# Altium PCB TCRT5000.PcbDoc
Units mm, origin at the board's own origin, x right, y up, seen from the top; angles counter-clockwise.
Board outline 98 x 98 mm, 2 copper layers (Top Layer, Bottom Layer); 66 components, 50 nets, 204 pads, 36 vias.
Unrouted connection lines stored in the file: 154.
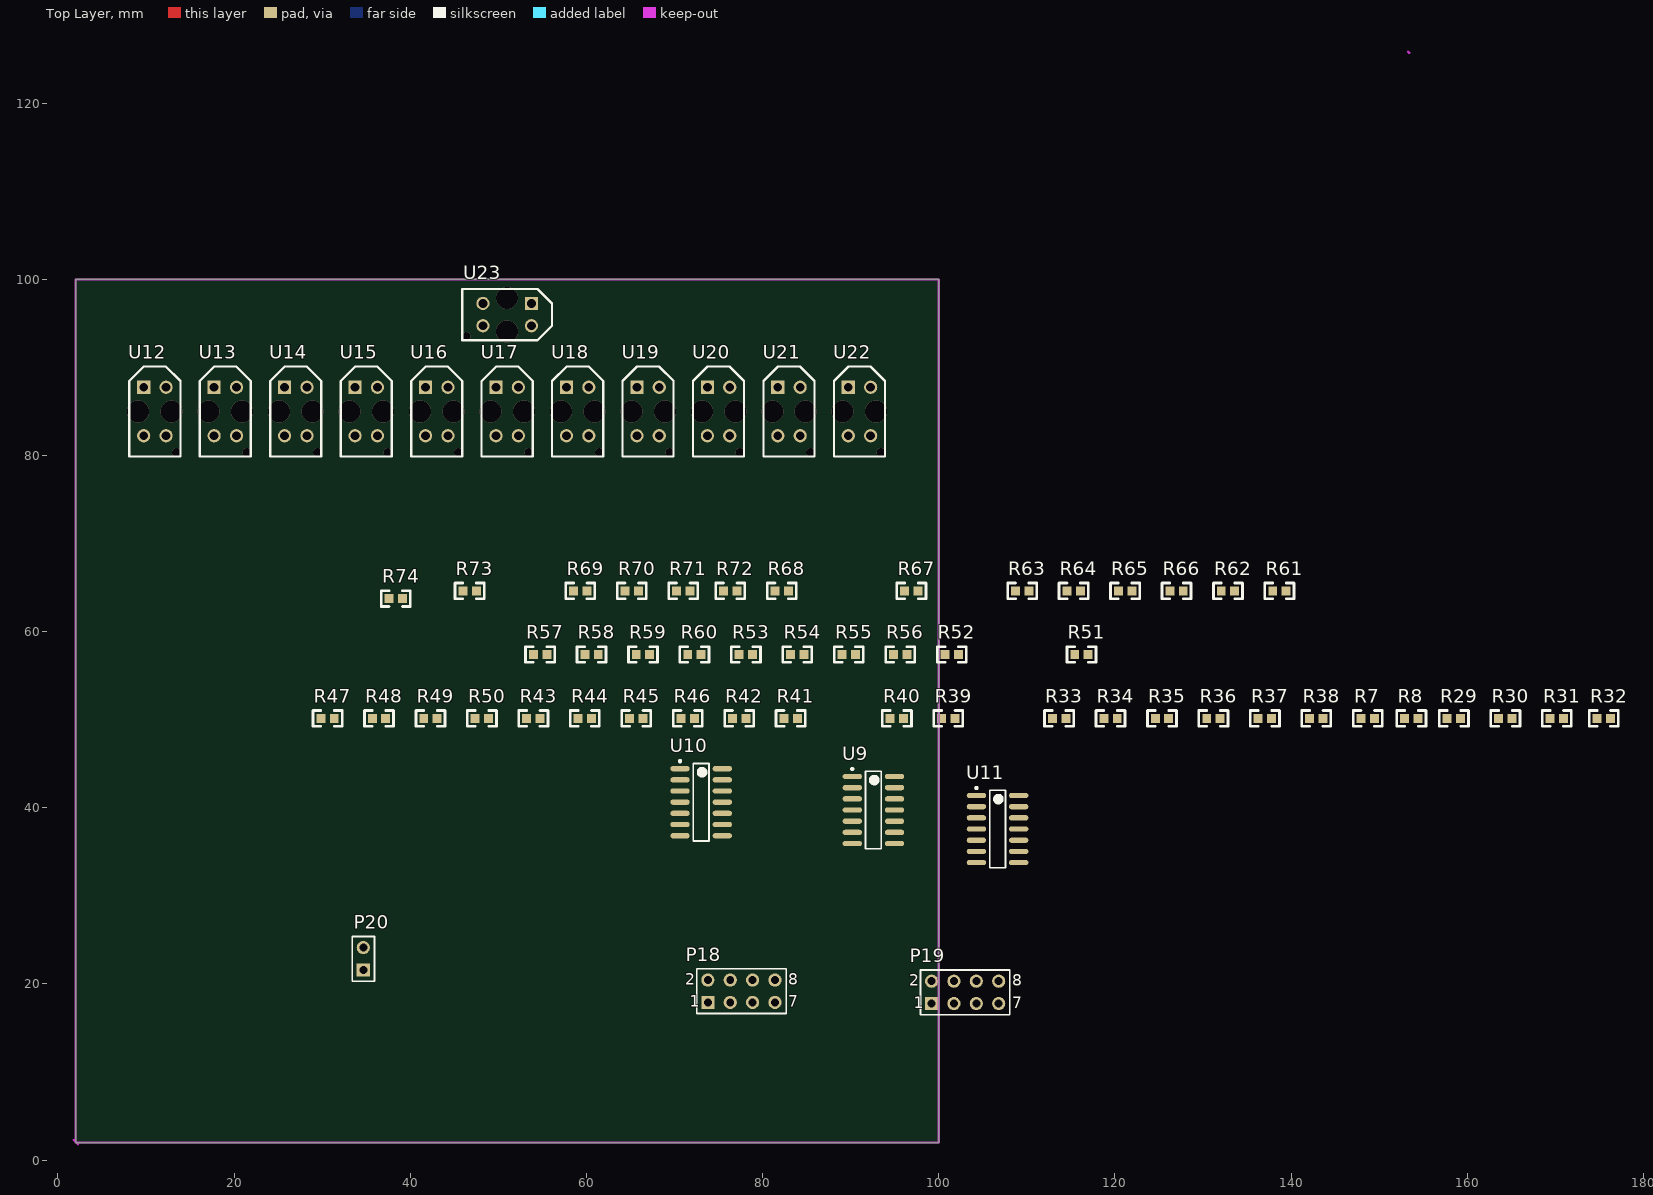
[diagram p0: Top Layer view]
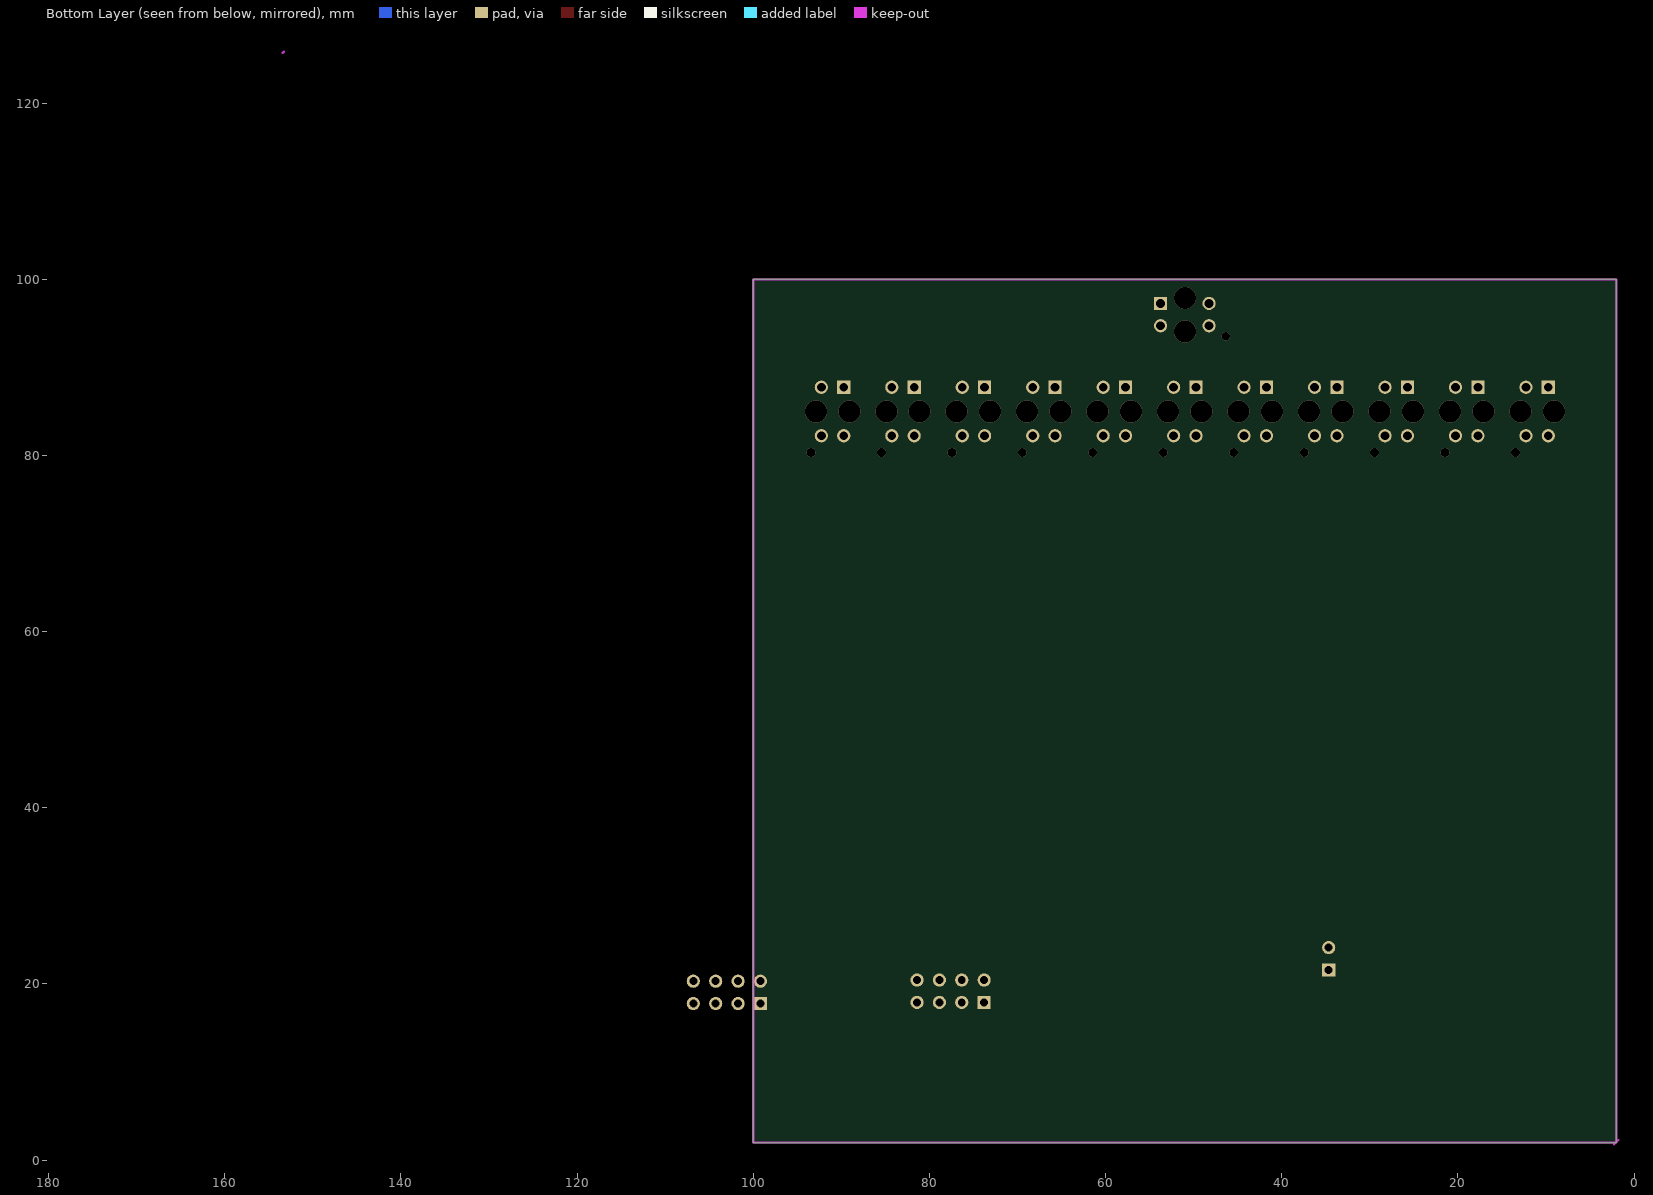
[diagram p1: Bottom Layer view, seen from below]

## Layer stack, top to bottom
Top Solder: solder mask 0.0102, Solder Resist, Dk 3.5
Top Layer: signal copper 0.0356
Dielectric 1: dielectric 0.32, FR-4, Dk 4.8
Bottom Layer: signal copper 0.0356
Bottom Solder: solder mask 0.0102, Solder Resist, Dk 3.5

## Board outline
2,2 2,100 100,100 100,2

## Design rules (kind name [scope] priority, off if disabled: settings)
Clearance [All] p1: gap=0.254
PolygonConnect [All] p1: connectstyle=Relief reliefconductorwidth=0.254 reliefentries=4 polygonreliefangle="90 Angle" airgapwidth=0.254
RoutingVias [All] p1: holewidth=0.711 width=1.27 viastyle="Through Hole" minholewidth=0.711 minwidth=1.27 maxholewidth=0.711 maxwidth=1.27
SolderMaskExpansion [All] p1: expansion=0.102
Width [All] p1: maxlimit=0.254 minlimit=0.254 preferedwidth=0.254
29 further rules are at their usual default settings.

## Classes and differential pairs
component class "Components Class 1": P18 P20 R40 R41 R42 R43 R44 R45 R46 R47 R48 R49 R50 R53 R54 R55 R56 R57 R58 R59 R60 R67 R68 R69 R70 R71 R72 R73 R74 U9 U10

## Components (designator, comment, footprint, x,y, rotation, side; value= is the part's Value field where it differs from the comment)
P18 "Header 4X2" HDR2X4 73.787,17.907 r0 top
P19 "Header 4X2" HDR2X4 99.187,17.78 r0 top
P20 "Header 2" HDR1X2 34.671,21.59 r90 top
R7 "Res3" 0603 147.955,50.165 r0 top
R8 "Res3" 0603 152.908,50.165 r0 top
R29 "Res3" 0603 157.734,50.165 r0 top
R30 "Res3" 0603 163.576,50.165 r0 top
R31 "Res3" 0603 169.418,50.165 r0 top
R32 "Res3" 0603 174.752,50.165 r0 top
R33 "Res3" 0603 112.903,50.165 r0 top
R34 "Res3" 0603 118.745,50.165 r0 top
R35 "Res3" 0603 124.587,50.165 r0 top
R36 "Res3" 0603 130.429,50.165 r0 top
R37 "Res3" 0603 136.271,50.165 r0 top
R38 "Res3" 0603 142.113,50.165 r0 top
R39 "Res3" 0603 100.33,50.165 r0 top
R40 "Res3" 0603 94.488,50.165 r0 top
R41 "Res3" 0603 82.423,50.165 r0 top
R42 "Res3" 0603 76.581,50.165 r0 top
R43 "Res3" 0603 53.213,50.165 r0 top
R44 "Res3" 0603 59.055,50.165 r0 top
R45 "Res3" 0603 64.897,50.165 r0 top
R46 "Res3" 0603 70.739,50.165 r0 top
R47 "Res3" 0603 29.845,50.165 r0 top
R48 "Res3" 0603 35.687,50.165 r0 top
R49 "Res3" 0603 41.529,50.165 r0 top
R50 "Res3" 0603 47.371,50.165 r0 top
R51 "Res3" 0603 115.443,57.404 r0 top
R52 "Res3" 0603 100.711,57.404 r0 top
R53 "Res3" 0603 77.343,57.404 r0 top
R54 "Res3" 0603 83.185,57.404 r0 top
R55 "Res3" 0603 89.027,57.404 r0 top
R56 "Res3" 0603 94.869,57.404 r0 top
R57 "Res3" 0603 53.975,57.404 r0 top
R58 "Res3" 0603 59.817,57.404 r0 top
R59 "Res3" 0603 65.659,57.404 r0 top
R60 "Res3" 0603 71.501,57.404 r0 top
R61 "Res3" 0603 137.922,64.643 r0 top
R62 "Res3" 0603 132.08,64.643 r0 top
R63 "Res3" 0603 108.712,64.643 r0 top
R64 "Res3" 0603 114.554,64.643 r0 top
R65 "Res3" 0603 120.396,64.643 r0 top
R66 "Res3" 0603 126.238,64.643 r0 top
R67 "Res3" 0603 96.139,64.643 r0 top
R68 "Res3" 0603 81.407,64.643 r0 top
R69 "Res3" 0603 58.547,64.643 r0 top
R70 "Res3" 0603 64.389,64.643 r0 top
R71 "Res3" 0603 70.231,64.643 r0 top
R72 "Res3" 0603 75.565,64.643 r0 top
R73 "Res3" 0603 45.974,64.643 r0 top
R74 "Res3" 0603 37.592,63.754 r0 top
U9 "LM324AD" D014_N 92.583,39.751 r0 top
U10 "LM324AD" D014_N 73.025,40.64 r0 top
U11 "LM324AD" D014_N 106.68,37.592 r0 top
U12 "Optoisolator1" TCRT5000 11,85 r90 top
U13 "Optoisolator1" TCRT5000 19,85 r90 top
U14 "Optoisolator1" TCRT5000 27,85 r90 top
U15 "Optoisolator1" TCRT5000 35,85 r90 top
U16 "Optoisolator1" TCRT5000 43,85 r90 top
U17 "Optoisolator1" TCRT5000 51,85 r90 top
U18 "Optoisolator1" TCRT5000 59,85 r90 top
U19 "Optoisolator1" TCRT5000 67,85 r90 top
U20 "Optoisolator1" TCRT5000 75,85 r90 top
U21 "Optoisolator1" TCRT5000 83,85 r90 top
U22 "Optoisolator1" TCRT5000 91,85 r90 top
U23 "Optoisolator1" TCRT5000 51,96 r0 top

## Footprints (in the part's own frame and the unit in brackets; to place one, negate y for a bottom-side part, rotate by r counter-clockwise, add the part's x,y. Pads: shape width x height; smd on the part's side, far side on the other; paste and mask are expansions set on the pad)
0603 [mil]
  rect 40x40 smd: 1(0,0) 2(60,0)
  silkscreen extent -35,-35 95,35
D014_N [mm] "SOIC, 14-Leads, Body 8.7x3.9mm, Pitch 1.27mm, IPC Medium Density"
  oval 2.2x0.6 smd: 1(-2.4,3.81) 2(-2.4,2.54) 3(-2.4,1.27) 4(-2.4,0) 5(-2.4,-1.27) 6(-2.4,-2.54) 7(-2.4,-3.81) 8(2.4,-3.81) 9(2.4,-2.54) 10(2.4,-1.27) 11(2.4,0) 12(2.4,1.27) 13(2.4,2.54) 14(2.4,3.81)
  silkscreen extent -2.52,-4.4 0.9,4.78, body extent -2,-4.38 2,4.38, height 1.75
HDR1X2 [mm] "Connector; Header; 2 Position"
  rect 1.5x1.5 hole 0.9: 1(0,0)
  round 1.5 hole 0.9: 2(2.54,0)
  silkscreen extent -1.27,-1.27 3.81,1.27
HDR2X4 [mm] "Connector; Header; 4x2 Position"
  rect 1.5x1.5 hole 0.9: 1(0,0)
  round 1.5 hole 0.9: 2(0,2.54) 3(2.54,0) 4(2.54,2.54) 5(5.08,0) 6(5.08,2.54) 7(7.62,0) 8(7.62,2.54)
  silkscreen extent -1.27,-1.27 8.89,3.81
TCRT5000 [mm]
  rect 1.5x1.5 hole 1: 1(2.75,1.27)
  round 1.5 hole 1: 2(2.75,-1.27) 3(-2.75,-1.27) 4(-2.75,1.27)
  silkscreen extent -5.1,-2.9 5.1,2.9

## Part data
P18 P19: "Header, 4-Pin, Dual row"
P20: "Header, 2-Pin"
R7 R8 R29 R30 R31 R32 R33 R34 R35 R36 R37 R38 R39 R40 R41 R42 R43 R44 R45 R46 R47 R48 R49 R50 R51 R52 R53 R54 R55 R56 R57 R58 R59 R60 R61 R62 R63 R64 R65 R66 R67 R68 R69 R70 R71 R72 R73 R74: "Resistor"
U9 U10 U11: "Quadruple Operational Amplifier"
U12 U13 U14 U15 U16 U17 U18 U19 U20 U21 U22 U23: "4-Pin Phototransistor Optocoupler"

## Via types
v1: diameter 2.5, hole 2.5, Top Layer to Bottom Layer, 24 vias
v2: diameter 1, hole 1, Top Layer to Bottom Layer, 12 vias

## Nets (pads, with @x,y where several pads share a name; then routed paths per layer and width w, separated by ;. In a path a pad name is that pad's centre, name@x,y a point inside that pad or via, vN(x,y) a via of type N, cw(c..) or ccw(c..) an arc to the next point about the centre after c; other vN are vias at no path point)
GND: P18.7 P18.8 P19.7 P19.8 P20.2 R33.2 R34.2 R35.2 R36.2 R37.2 R38.2 R40.2 R42.2 R43.1 R45.1 R47.1 R49.1 R52.2 R53.1 R55.1 R57.1 R59.1 R62.2 R63.1 R65.1 R68.2 R69.1 R71.1 R74.2 U9.11 U10.11 U11.11 U12.2 U13.2 U14.2 U15.2 U16.2 U17.2 U18.2 U19.2 U20.2 U21.2 U22.2 U23.2
NetR7_1: R7.1 U12.1
NetR8_1: R8.1 U13.1
NetR29_1: R29.1 U14.1
NetR30_1: R30.1 U15.1
NetR31_1: R31.1 U16.1
NetR32_1: R32.1 U17.1
NetR39_1: R39.1 U18.1
NetR41_1: R41.1 U19.1
NetR43_2: R43.2 R44.1 U9.2
NetR45_2: R45.2 R46.1 U9.6
NetR47_2: R47.2 R48.1 U11.2
NetR49_2: R49.2 R50.1 U11.6
NetR51_1: R51.1 U20.1
NetR53_2: R53.2 R54.1 U11.9
NetR55_2: R55.2 R56.1 U11.13
NetR57_2: R57.2 R58.1 U9.9
NetR59_2: R59.2 R60.1 U9.13
NetR61_1: R61.1 U21.1
NetR63_2: R63.2 R64.1 U10.2
NetR65_2: R65.2 R66.1 U10.6
NetR67_1: R67.1 U22.1
NetR69_2: R69.2 R70.1 U10.9
NetR71_2: R71.2 R72.1 U10.13
NetR73_1: R73.1 U23.1
VCC: P20.1 R7.2 R8.2 R29.2 R30.2 R31.2 R32.2 R39.2 R41.2 R51.2 R61.2 R67.2 R73.2 U9.4 U10.4 U11.4 U12.4 U13.4 U14.4 U15.4 U16.4 U17.4 U18.4 U19.4 U20.4 U21.4 U22.4 U23.4
VI1: R33.1 U9.3 U12.3
VI2: R34.1 U9.5 U13.3
VI3: R35.1 U9.10 U14.3
VI4: R36.1 U9.12 U15.3
VI5: R37.1 U10.3 U16.3
VI6: R38.1 U10.5 U17.3
VI7: R40.1 U10.10 U18.3
VI8: R42.1 U10.12 U19.3
VI9: R52.1 U11.3 U20.3
VI10: R62.1 U11.5 U21.3
VI11: R68.1 U11.10 U22.3
VI12: R74.1 U11.12 U23.3
VO1: P18.1 R44.2 U9.1
VO2: P18.2 R46.2 U9.7
VO3: P18.3 R58.2 U9.8
VO4: P18.4 R60.2 U9.14
VO5: P18.5 R64.2 U10.1
VO6: P18.6 R66.2 U10.7
VO7: P19.1 R70.2 U10.8
VO8: P19.2 R72.2 U10.14
VO9: P19.3 R48.2 U11.1
VO10: P19.4 R50.2 U11.7
VO11: P19.5 R54.2 U11.8
VO12: P19.6 R56.2 U11.14
copper on no net:
  other v1: 9.1,85 12.9,85 17.1,85 20.9,85 25.1,85 28.9,85 33.1,85 36.9,85 41.1,85 44.9,85 49.1,85 52.9,85 57.1,85 60.9,85 65.1,85 68.9,85 73.1,85 76.9,85 81.1,85 84.9,85 89.1,85 92.9,85 51,94.1 51,97.9
  other v2: 13.45,80.35 21.45,80.35 29.45,80.35 37.45,80.35 45.45,80.35 53.45,80.35 61.45,80.35 69.45,80.35 77.45,80.35 85.45,80.35 93.45,80.35 46.35,93.55

## Keep-outs
Keep-Out Layer:
  lines w0.254: 1.778,2.286 2.286,1.778 ; 153.289,125.857 153.416,125.73 ; 2,2 100,2 100,100 2,100 2,2

## Text inside footprints (layer, text, board x,y; h text height)
P18: Top Overlay "2" at 71.247,19.939 h1.27; Top Overlay "1" at 71.755,17.399 h1.27; Top Overlay "7" at 82.931,17.399 h1.27; Top Overlay "8" at 82.931,19.939 h1.27
P19: Top Overlay "2" at 96.647,19.812 h1.27; Top Overlay "1" at 97.155,17.272 h1.27; Top Overlay "7" at 108.331,17.272 h1.27; Top Overlay "8" at 108.331,19.812 h1.27